# Altium PCB Trinamic Driver PCB.PcbDoc
Units mil, origin at the board's own origin, x right, y up, seen from the top; angles counter-clockwise.
Board outline 920 x 2060 mil, 2 copper layers (Top Layer, Bottom Layer); 21 components, 34 nets, 109 pads, 14 vias.
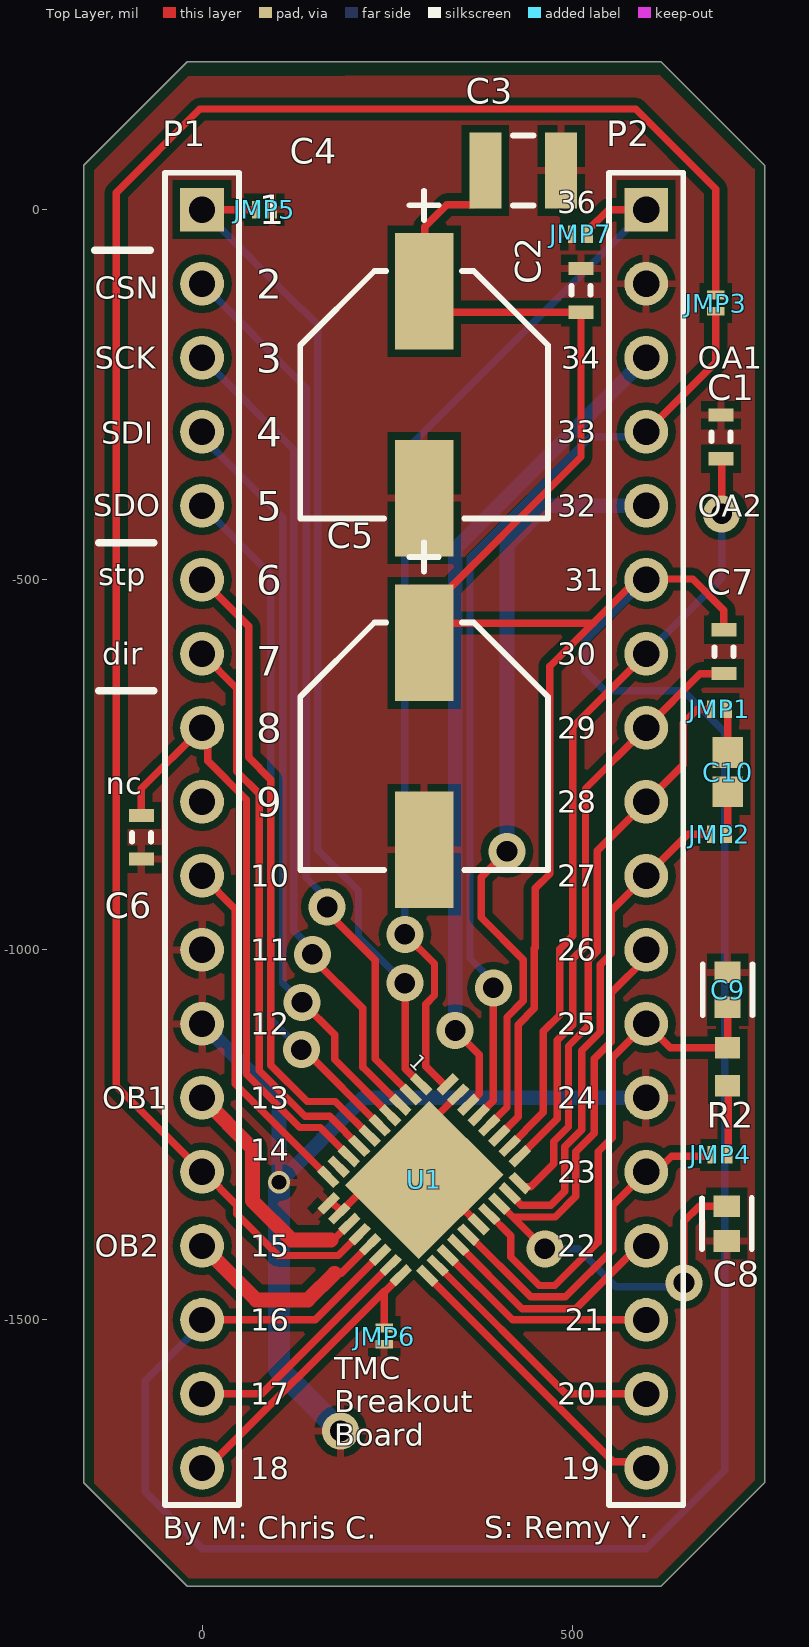
[diagram p0: Top Layer view]
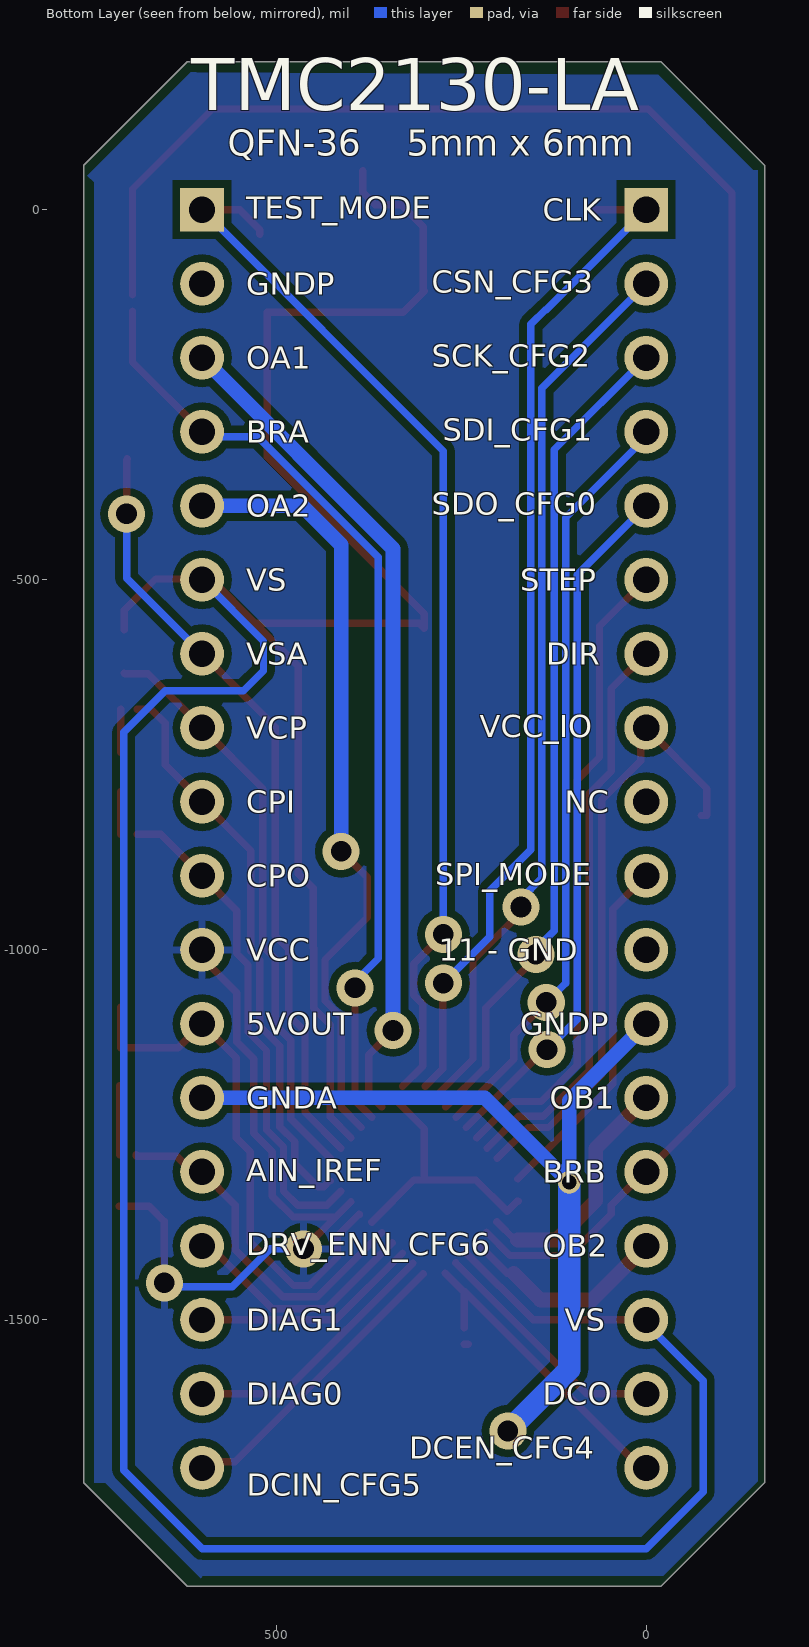
[diagram p1: Bottom Layer view, seen from below]

## Layer stack, top to bottom
Top Solder: solder mask 0.4, Solder Resist, Dk 3.5
Top Layer: signal copper 1.4
Dielectric 1: dielectric 12.6, FR-4, Dk 4.8
Bottom Layer: signal copper 1.4
Bottom Solder: solder mask 0.4, Solder Resist, Dk 3.5

## Board outline
-160,60 -20,200 620,200 760,60 760,-1720 620,-1860 -20,-1860 -160,-1720

## Design rules (kind name [scope] priority, off if disabled: settings)
Clearance [All] p1: gap=10 ignorepadtopadclearanceinfootprint=FALSE except(0: Arc-Hole Track-Hole SMDPad-Hole THPad-Hole Via-Hole Fill-Hole Poly-Hole Region-Hole Text-Hole; 4.9: SMDPad-SMDPad; 5: Arc-Arc Arc-Track Track-Track; 8: Arc-SMDPad Track-SMDPad)
MinimumSolderMaskSliver [All] p1: minsoldermaskwidth=3
PolygonConnect [All] p1: connectstyle=Relief reliefconductorwidth=10 reliefentries=4 polygonreliefangle="90 Angle" airgapwidth=10
RoutingVias [All] p1: holewidth=28 width=50 viastyle="Through Hole" minholewidth=28 minwidth=50 maxholewidth=28 maxwidth=50
SilkToSilkClearance [All] p1: silktosilkclearance=0
SilkToSolderMaskClearance [IsPad] p1: minsilkscreentomaskgap=0 clearancetoexposedcopper=TRUE
SolderMaskExpansion SolderMaskExpansion_1 [IsVia] p1: expansion=4 istentingtop=TRUE
SolderMaskExpansion [All] p2: expansion=4 istentingtop=FALSE
Width [All] p1: maxlimit=30 minlimit=10 preferedwidth=20 minimp=50.000000 maximp=50.000000 favimp=50.000000
27 further rules are at their usual default settings.

## Components (designator, comment, footprint, x,y, rotation, side; value= is the part's Value field where it differs from the comment)
C1 "0.1uF" CAPC1608X90X20LL10 701,-307 r270 top
C2 "0.1uF" CAPC1608X90X20LL10 512,-109 r270 top
C3 "47uF" CAPC3225X270X50LL20T25 434,53 r180 top
C4 "100uF" FP-EEE-FK1H101P-MFG 300,-250 r90 top
C5 "100uF" FP-EEE-FK1H101P-MFG 300,-725 r90 top
C6 "0.1uF" CAPC1608X90X20LL10 -82,-848 r90 top
C7 "0.1uF" CAPC1608X90X20LL10 705,-597 r270 top
C8 "0.47uF" FP-C0603C-CF-MFG 709,-1370 r90 top value="0.47 μF"
C9 "4.7uF" FP-C0603-CG-MFG 710,-1054 r90 top
C10 "22nF" CAPC1608X90X40ML10T20 710,-760 r270 top
JMP1 "Solder Jump" "Solder Jump" 688,-675 r0 top
JMP2 "Solder Jump" "Solder Jump" 688,-844 r0 top
JMP3 "Solder Jump" "Solder Jump" 694,-115.09 r270 top
JMP4 "Solder Jump" "Solder Jump" 689,-1277 r0 top
JMP5 "Solder Jump" "Solder Jump" 95,0 r180 top
JMP6 "Solder Jump" "Solder Jump" 246,-1511 r270 top
JMP7 "Solder Jump" "Solder Jump" 522,-33 r180 top
P1 "Header 18" HDR1X18 0,0 r270 top
P2 "Header 18" HDR1X18 600,0 r270 top
R2 "10K" RESC1609X55X30LL15T15 710,-1158 r90 top
U1 "TMC2130-LA" QFN-36 300,-1311 r315 top

## Footprints (in the part's own frame and the unit in brackets; to place one, negate y for a bottom-side part, rotate by r counter-clockwise, add the part's x,y. Pads: shape width x height; smd on the part's side, far side on the other; paste and mask are expansions set on the pad)
CAPC1608X90X20LL10 [mm] "Chip Capacitor, 2-Leads, Body 1.70x0.90mm, IPC High Density"
  rect 0.45x0.85 smd: 1(-0.75,0) 2(0.75,0)
  silkscreen extent -0.15,-0.33 0.15,0.33, body extent -0.85,-0.45 0.85,0.45, height 0.9
CAPC1608X90X40ML10T20 [mm] "Chip Capacitor, 2-Leads, Body 1.7x0.9mm, IPC Low Density"
  rect 1.05x1.05 smd: 1(-0.675,0) 2(0.675,0)
  body extent -0.85,-0.45 0.85,0.45, height 0.9
CAPC3225X270X50LL20T25 [mm] "Chip Capacitor, 2-Leads, Body 3.20x2.50mm, IPC High Density"
  rect 1.1x2.6 smd: 1(-1.3,0) 2(1.3,0)
  silkscreen extent -0.35,-1.2 0.35,1.2, body extent -1.7,-1.35 1.7,1.35, height 2.7
FP-C0603-CG-MFG [mm]
  rect 0.75x0.9 smd paste+0 mask+0: 1(-0.6,0) 2(0.6,0)
  silkscreen extent -0.87,-0.85 0.87,0.85, body extent -1.2,-0.6 1.2,0.6, height 0.25
FP-C0603C-CF-MFG [mm]
  rect 0.75x0.9 smd paste+0 mask+0: 1(-0.6,0) 2(0.6,0)
  silkscreen extent -0.87,-0.85 0.88,0.85, body extent -1.2,-0.6 1.2,0.6, height 0.25
FP-EEE-FK1H101P-MFG [mm]
  rect 4x2 smd paste+0 mask+0: 1(-3.55,0) 2(3.55,0)
  silkscreen extent -4.25,-4.25 7,4.25, body extent -5.8,-4.5 5.8,4.5, height 0.25
HDR1X18 [mm] "Connector; Header; 18 Position"
  rect 1.5x1.5 hole 0.9: 1(0,0)
  round 1.5 hole 0.9: 2(2.54,0) 3(5.08,0) 4(7.62,0) 5(10.16,0) 6(12.7,0) 7(15.24,0) 8(17.78,0) 9(20.32,0) 10(22.86,0) 11(25.4,0) 12(27.94,0) 13(30.48,0) 14(33.02,0) 15(35.56,0) 16(38.1,0) 17(40.64,0) 18(43.18,0)
  silkscreen extent -1.27,-1.27 44.45,1.27
QFN-36 [mm]
  rect 0.8x0.3 smd mask+0: 1(-2.4,2.25) 2(-2.4,1.75) 3(-2.4,1.25) 4(-2.4,0.75) 5(-2.4,0.25) 6(-2.4,-0.25) 7(-2.4,-0.75) 8(-2.4,-1.25) 9(-2.4,-1.75) 10(-2.4,-2.25) 19(2.4,-2.25) 20(2.4,-1.75) 21(2.4,-1.25) 22(2.4,-0.75) 23(2.4,-0.25) 24(2.4,0.25) 25(2.4,0.75) 26(2.4,1.25) 27(2.4,1.75) 28(2.4,2.25)
  rect 0.3x0.8 smd mask+0: 11(-1.75,-2.875) 12(-1.25,-2.875) 13(-0.75,-2.875) 14(-0.25,-2.875) 15(0.25,-2.875) 16(0.75,-2.875) 17(1.25,-2.875) 18(1.75,-2.875) 29(1.75,2.9) 30(1.25,2.9) 31(0.75,2.9) 32(0.25,2.9) 33(-0.25,2.9) 34(-0.75,2.9) 35(-1.25,2.9) 36(-1.75,2.9)
  rect 3.6x4.1 smd mask+0: -(0,0)
RESC1609X55X30LL15T15 [mm] "Chip Resistor, 2-Leads, Body 1.75x0.95mm, IPC High Density"
  rect 0.75x0.85 smd: 1(-0.65,0) 2(0.65,0)
  body extent -0.87,-0.48 0.87,0.48, height 0.55
"Solder Jump" [mm]
  rect 0.3x0.6 smd mask+0: 1(0,0) 2(0.559,0)

## Part data
C1 C2 C6 C7: library part CMP-2000-07546-1, "Chip Capacitor, 0.1 uF, +/- 10%, 50 V, -55 to 125 degC, 0603 (1608 Metric), RoHS, Tape and Reel", Capacitance=100nF, Case Code (Imperial)=0603, Case Code (Metric)=1608, Dielectric=X7R, Manufacturer=TDK, Max Operating Temperature=125degC, Min Operating Temperature=-55degC, Package Description="2-Pin Surface Mount Device, Body 1.6 x 0.8 mm", Package Quantity=1, Package Reference=603, Tolerance=10%, Voltage=50V, Case/Package=0603, Composition=Ceramic, Datasheet URL=https://product.tdk.com/info/en/catalog/datasheets/mlcc_automotive_general_en.pdf, Datasheet Version=12/2014, Depth=0.8mm, Height=0.8mm, Lead Free=LeadFree, Length=1.6mm, Manufacturer URL=http://www.tdk.com/, Mount=SurfaceMount, Mounting Technology=SurfaceMount, Packaging=TapeandReel, Radiation Hardening=No, REACH SVHC=NoSVHC, RoHSCompliant=True, Termination=SMD/SMT, Thickness=0.035inch, Voltage Rating=50V, Voltage Rating (DC)=50V, Weight=7.1E-05oz, Width=0.8mm
C3: library part CMP-2000-06020-1, "Chip Capacitor, 47 uF, +/- 20%, 16 V, -55 to 85 degC, 1210 (3225 Metric), RoHS, Tape and Reel", Capacitance=47µF, Manufacturer=Kemet, Operating Temperature=-55°C~85°C, Package / Case=1210(3225Metric), Package Description="2-Pin Surface Mount Device, Body 3.2 x 2.5 mm", Package Reference=1210, Ratings=-, Standard Package=1, Temperature Coefficient=X5R, Tolerance=±20%, Voltage - Rated=16V, Applications=GeneralPurpose, Catalog Drawings=ACTU_1210, Category=Capacitors, Datasheet URL=http://www.datasheets360.com/pdf/-8690541728068054270, Datasheet Version=05/2013, Family=CeramicCapacitors, Features=-, Height - Seated (Max)=-, Lead Spacing=-, Lead Style=-, Manufacturer URL=http://www.kemet.com/, Mounting Technology=SurfaceMount, Mounting Type=SurfaceMount,MLCC, Online Catalog=X5RDielectric(CommercialGrade), Other Names=399-5514-6, Packaging=Digi-Reel®, Product Training Modules=CapacitorBasics-TypicalUsesforCapacitors, Series=C, Size / Dimension="0.126\"Lx0.098\"W(3.20mmx2.50mm)", Thickness (Max)="0.110\"(2.80mm)"
C4 C5: library part CMP-05427-000005-1, "CAP ALUM 100UF 20% 50V SMD", Leakage Current=50uA, Manufacturer="Panasonic Electronic Components", Manufacturer Part Number=EEE-FK1H101P, Package=0, Ripple Current=350mA, Temperature="-55°C to +105°C", Temperature Range High=+105°C, Temperature Range Low=-55°C, Tolerance=20%, Voltage Rating=50V, Automotive=Yes, Automotive Grade="Grade 2", Capacitance=100uF, Category=Cap, ComponentLink2Description=Datasheet, ComponentLink2URL=https://industrial.panasonic.com/cdbs/www-data/pdf/RDE0000/ABA0000C1181.pdf, Device Class L1="Passive Components", Device Class L2=Capacitors, Device Class L3="Aluminum Electrolytic Capacitors", Digikey Description="CAP ALUM 100UF 20% 50V SMD", Dissipation Factor=10%, Esr=0.34Ω, Height=10.5mm, Lead Free=Yes, Life=2000Hours, Material=Aluminum, Mouser Description="Cap Aluminum Lytic 100uF 50V 20% (8 X 10.2mm) SMD 350mA 2000h 105C Automotive T/R", Octopart=https://octopart.com/eeefk1h101p-panasonic-4642841, RoHS=TRUE
C8: library part CMP-03020-024061-1, "CAP CER 0.47UF 16V X7R 0603", Capacitance="0.47 μF", Manufacturer=KEMET, Manufacturer Part Number=C0603C474K4RACTU, Package=C0603C-CF, Temperature="-55°C to +125°C", Temperature Characteristic=X7R, Temperature Coefficient=30ppm/°C, Temperature Range High=+125°C, Temperature Range Low=-55°C, Tolerance=0.1, Voltage Rating="16 V", Automotive=Yes, Automotive Grade="Grade 1", Category=Cap, ComponentLink2Description=Datasheet, ComponentLink2URL=https://api.kemet.com/component-edge/download/datasheet/C0603C100J5GACAUTO.pdf, Device Class L1="Passive Components", Device Class L2=Capacitors, Device Class L3="Ceramic Capacitors", Digikey Description="CAP CER 0.47UF 16V X7R 0603", Height=0.87mm, Lead Free=Yes, Material=Ceramic, Mouser Description="0603 C 470nF Ceramic Multilayer Capacitor, 16 V, +125degC, X7R Dielec, +/-10%", Octopart=https://octopart.com/c0603c474k4ractu-kemet-109683, RoHS=TRUE
C9: library part CMP-03020-024641-1, "CAP CER 4.7UF 6.3V X5R 0603", Manufacturer=Kemet, Manufacturer Part Number=C0603C475K9PACTU, Package=C0603-CG, Temperature="-55°C to +85°C", Temperature Characteristic=X5R, Temperature Coefficient=15%, Temperature Range High=+85°C, Temperature Range Low=-55°C, Tolerance=10%, Voltage Rating=6.3V, Automotive=No, Capacitance=4.7uF, Category=Cap, ComponentLink2Description=Datasheet, ComponentLink2URL=https://content.kemet.com/datasheets/KEM_C1006_X5R_SMD.pdf, Device Class L1="Passive Components", Device Class L2=Capacitors, Device Class L3="Ceramic Capacitors", Digikey Description="CAP CER 4.7UF 6.3V X5R 0603", Height=0.9mm, Ipc Land Pattern Name=CAPC16080X80, Lead Free=Yes, Material=Ceramic, Mouser Description="Multilayer Ceramic Capacitors MLCC - SMD/SMT 6.3volts 4.7uF X5R 10%", Octopart=https://octopart.com/c0603c475k9pactu-kemet-104242, RoHS=TRUE
C10: library part CMP-2100-03602-1, "Chip Capacitor, 22 nF, +/- 10%, 50 V, -55 to 125 degC, 0603 (1608 Metric), RoHS, Tape and Reel", Case Code (Imperial)=0603, Case Code (Metric)=1608, Dielectric=X7R, Dielectric Material=Ceramic, Insulation Resistance=100GR, Manufacturer=Yageo, Max Operating Temperature=125degC, Min Operating Temperature=-55degC, Package Description="2-Pin Surface Mount Device, Body 1.6 x 0.8 mm", Package Quantity=1, Tolerance=10%, Voltage Rating=50V, Capacitance=22nF, Case/Package=0603, Composition=Ceramic, Datasheet URL=http://www.yageo.com/documents/recent/UPY-GPHC_X7R_6.3V-to-50V_15.pdf, Datasheet Version="Rev. 15, 10/2016", Depth=0.8mm, Height=0.8mm, Lead Free=LeadFree, Length=1.6mm, Manufacturer URL=http://www.yageo.com/, Mount=SurfaceMount, Number of Pins=2, Package Reference=0603, Packaging=TapeandReel, Radiation Hardening=No, REACH SVHC=NoSVHC, RoHSCompliant=True, Termination=SMD/SMT, Thickness=0.035inch, Voltage Rating (DC)=50V, Width=0.031inch
P1 P2: "Header, 18-Pin", LatestRevisionDate=17-Jul-2002, LatestRevisionNote="Re-released for DXP Platform.", Publisher="Altium Limited"
R2: library part CMP-2000-07452-1, "Chip Resistor, 10 KOhm, +/- 1%, 0.1 W, -55 to 155 degC, 0603 (1608 Metric), RoHS, Tape and Reel", Case Code (Imperial)=0603, Case Code (Metric)=1608, Manufacturer=Panasonic, Max Operating Temperature=155degC, Max Power Dissipation=100mW, Min Operating Temperature=-55degC, Package Description="2-Pin Surface Mount Device, Body 1.6 x 0.85 mm", Package Quantity=1, Package Reference=603, Resistance=10KOhm, Temperature Coefficient=100ppm\/degreesC, Tolerance=1%, Voltage Rating=75V, Case\/Package=0603, Composition=ThickFilm, Contact Plating=Tin, Datasheet URL=https://industrial.panasonic.com/cdbs/www-data/pdf/RDA0000/AOA0000C304.pdf, Datasheet Version=02/2017, Depth=0.8mm, Height=0.45mm, Lead Free=LeadFree, Length=1.6mm, Manufacturer URL=http://www.panasonic.com/, Military Standard=Not, Mount=SurfaceMount, Mounting Technology=SurfaceMount, Number of Pins=2, Number of Terminations=2, Packaging=TapeandReel, Power Rating=100mW, Radiation Hardening=No, REACH SVHC=NoSVHC, RoHSCompliant=true, Termination=SMD/SMT, Voltage Rating (DC)=75V, Width=0.031inch
U1: "TMC2130-LA Trinamic Driver QFN-36"

## Via types
v1: diameter 50, hole 28, Top Layer to Bottom Layer, tented both sides, 13 vias
v2: diameter 30, hole 20, Top Layer to Bottom Layer, tented both sides, 1 vias

## Nets (pads, with @x,y where several pads share a name; then routed paths per layer and width w, separated by ;. In a path a pad name is that pad's centre, name@x,y a point inside that pad or via, vN(x,y) a via of type N, cw(c..) or ccw(c..) an arc to the next point about the centre after c; other vN are vias at no path point)
5VOUT: C9.1 P2.12 R2.2 U1.25 | length 741.3
  Top Layer w10: U1.25@387.69,-1357.69 U1.25 417,-1386.24 417,-1415 455.48,-1453.48 476.52,-1453.48 535,-1395 535,-1273 554,-1254 554,-1146 P2.12 ; P2.12@600,-1088 P2.12 ; C9.1 R2.2 632.41,-1132.41 P2.12
AIN_IREF: JMP4.1 P2.14 U1.23 | length 483.3
  Top Layer w10: U1.23@357.07,-1381.99 444.08,-1469 491,-1469 555,-1405 555,-1345 P2.14 613.27,-1300 634.27,-1279 688.09,-1279 689,-1278.09 JMP4.1
BRA: JMP3.2 P2.4 U1.33 | length 1288.8
  Top Layer w10: U1.33@370.99,-1226.09 393.4,-1203.68 v1(393.4,-1051.4) ; P2.4 694,-206 JMP3.2
  Bottom Layer w10: v1(393.4,-1051.4) 393.4,-1043.11 362,-1011.71 362,-469.68 524.68,-307 P2.4@593,-307
  Bottom Layer w15: P2.4@593,-307 P2.4
BRB: JMP3.1 P1.14 U1.14 | length 2698.4
  Top Layer w10: U1.14@215.79,-1381.29 184.08,-1413 103,-1413 47,-1357 47,-1345 2,-1300 P1.14 -116,-1184 -116,23 -3,136 586,136 694,28 JMP3.1
CLK: JMP5.2 P1.1 U1.1 | length 1381.6
  Top Layer w10: P1.1 JMP5.2 ; v1(274,-1045) 274.73,-1045.73 274.73,-1160.46 U1.1@298.61,-1184.33
  Bottom Layer w10: P1.1 135,-135 136,-135 156,-155 156,-865 211.32,-920.32 211.32,-982.32 v1(274,-1045)
CPI: JMP1.1 P2.9 U1.28 | length 777.7
  Top Layer w10: U1.28@426.67,-1312.39 427.95,-1312.39 435.64,-1320.08 443.92,-1320.08 475,-1289 475,-1259 495,-1239 495,-1130 522,-1103 522,-1014 534,-1002 534,-866 P2.9 650,-750 650,-694 669,-675 JMP1.1
CPO: JMP2.1 P2.10 U1.27 | length 675.6
  Top Layer w10: U1.27@412.75,-1326.31 431.44,-1345 471,-1345 490,-1326 490,-1266 513,-1243 513,-1136 538,-1111 538,-1020 553,-1005 553,-947 P2.10 656,-844 JMP2.1
CSN_CFG3: P1.2 U1.2 | length 1216.2
  Top Layer w10: v1(169,-942) 169,-949 234,-1014 234,-1147.56 U1.2@284.69,-1198.25
  Bottom Layer w10: P1.2 141,-241 141,-903 169,-931 v1(169,-942)
DCEN_CFG4: JMP6.1 P1.18 U1.18 | length 430.8
  Top Layer w10: P1.18 7.16,-1700 246,-1461.16 JMP6.1 ; 246,-1462.44 U1.18@271.47,-1436.97
DCIN_CFG5: P2.18 U1.19 | length 407.3
  Top Layer w10: U1.19@301.39,-1437.67 555.47,-1691.75 591.75,-1691.75 P2.18
DCO: P1.17 U1.17 | length 330.8
  Top Layer w10: P1.17 80.6,-1600 U1.17@257.55,-1423.05
DIAG0: P2.17 U1.20 | length 357.7
  Top Layer w10: U1.20@315.31,-1423.75 491.56,-1600 P2.17
DIAG1: P2.16 U1.21 | length 308.1
  Top Layer w10: U1.21@329.23,-1409.83 419.4,-1500 P2.16
DIR: P1.7 U1.7 | length 776.4
  Top Layer w10: P1.7 47,-647 47,-759 77,-789 77,-1163 139,-1225 172.24,-1225 U1.7@215.09,-1267.85
DRV_ENN_CFG6: P2.15 U1.22 | length 329
  Top Layer w10: U1.22@343.15,-1395.91 432.24,-1485 505,-1485 590,-1400 P2.15
GND: C1.1 C2.1 C3.1 C4.1 C5.1 C6.1 C8.1 C9.2 JMP5.1 JMP6.2 JMP7.2 P1.11 P1.12 P2.2 P2.13 U1.11 U1.12 U1.24 U1.35 U1.- | length 1564.5
  Top Layer w10: U1.11@172.75,-1339.53 174.03,-1339.53 187.95,-1353.45 230.4,-1311 U1.- ; JMP6.2@240.09,-1533 JMP6.2 ; U1.35@343.15,-1198.25 300,-1241.4 U1.- ; U1.24@370.99,-1368.07 313.92,-1311 U1.- ; P2.13@591.47,-1208.53 P2.13
  Bottom Layer w20: P1.12 104,-1204 v2(104,-1314) 218,-1200 P2.13
  Bottom Layer w30: v2(104,-1314) 104,-1567 v1(187,-1650)
MISO_CFG0: P1.5 U1.5 | length 948.9
  Top Layer w10: P1.5 P1.5@6,-400 ; v1(134,-1135) 137.92,-1135 U1.5@242.93,-1240.01
  Bottom Layer w10: P1.5 93,-493 93,-1094 v1(134,-1135)
MOSI_CFG1: P1.4 U1.4 | length 1031
  Top Layer w10: P1.4@0,-302 P1.4 ; v1(135,-1071) 179,-1115 179,-1148.24 U1.4@256.85,-1226.09
  Bottom Layer w10: P1.4@-2.5,-304.5 108.9,-415.9 108.9,-1044.9 v1(135,-1071)
NetC10_1: C10.1 JMP1.2 | length 58.4
  Top Layer w10: C10.1 JMP1.2
NetC10_2: C10.2 JMP2.2 | length 57.4
  Top Layer w10: JMP2.2 C10.2
NetJMP4_2: JMP4.2 R2.1 | length 93.4
  Top Layer w10: JMP4.2 R2.1@711,-1183.59
OA1: P2.3 U1.34 | length 1145.5
  Top Layer w10: v1(342,-1109) 374.6,-1141.6 374.6,-1194.64 U1.34@357.07,-1212.17
  Top Layer w20: v1(342,-1109) v1@346,-1113
  Bottom Layer w20: v1(342,-1109) 342,-458 P2.3
OA2: P2.5 U1.32 | length 1055.4
  Top Layer w10: U1.32@384.91,-1240.01 412,-1212.92 412,-1091 434,-1069 434,-1013.28 377,-956.28 377,-902 v1(412,-867)
  Bottom Layer w20: v1(412,-867) 412,-453 465,-400 P2.5
OB1: P1.13 U1.13 | length 333.2
  Top Layer w10: 174,-1392 177.24,-1392 U1.13@201.87,-1367.37
  Top Layer w20: P1.13 68,-1268 68,-1339 121,-1392 174,-1392
OB2: P1.15 U1.15 | length 292.2
  Top Layer w10: 179,-1437 187.92,-1437 U1.15@229.71,-1395.21
  Top Layer w20: P1.15 73,-1473 143,-1473 179,-1437
SCK_CFG2: P1.3 U1.3 | length 1133.3
  Top Layer w10: P1.3@0,-209 P1.3 ; v1(149,-1006) 149,-1011 217,-1079 217,-1158.4 U1.3@270.77,-1212.17
  Bottom Layer w10: P1.3 124,-324 124,-974.43 149,-999.43 v1(149,-1006)
SPI_MODE: P1.10 U1.10 | length 481.4
  Top Layer w10: P1.10 45,-945 45,-1181.27 U1.10@173.33,-1309.61
STEP: P1.6 U1.6 | length 871.1
  Top Layer w10: P1.6 63,-563 63,-740 93,-770 93,-1156 142,-1205 180.08,-1205 U1.6@229.01,-1253.93
TST_MODE: JMP7.1 P2.1 U1.36 | length 1447.3
  Top Layer w10: v1(274,-979) 314,-1019 314,-1061.57 302,-1073.57 302,-1157.1 U1.36@329.23,-1184.33 ; JMP7.1 522,-27.09 549.09,0 P2.1
  Bottom Layer w10: v1(274,-979) 274,-326 P2.1
VCC: C8.2 P2.11 U1.26 | length 922.1
  Top Layer w10: U1.26@398.83,-1340.23 419.6,-1361 ; v1(463,-1404) 462.6,-1404 419.6,-1361 ; P2.11@600,-1011 553,-1058 553,-1124 530,-1147 530,-1248 505,-1273 505,-1333 477,-1361 419.6,-1361 ; P2.11 P2.11@609.47,-1000 ; v1(651,-1450) 651,-1367 671.62,-1346.38 C8.2 C8.2@711.95,-1346.38
  Bottom Layer w10: v1(463,-1404) 508,-1404 559,-1455 646,-1455 v1(651,-1450)
VCC_IO: C6.2 P1.8 U1.8 | length 841.5
  Top Layer w10: C6.2@-74.13,-818.47 C6.2 -82,-782 P1.8 7.53,-707.53 7.53,-744.53 60,-797 60,-1168 132,-1240 159.4,-1240 U1.8@201.17,-1281.77
VCP: C7.2 P2.8 U1.29 | length 789
  Top Layer w10: U1.29@426.67,-1281.77 480,-1228.44 480,-1122 501,-1101 501,-1012 518,-995 518,-782 P2.8 673.27,-626.73 704.8,-626.73 C7.2
VS: C2.2 C3.2 C4.2 C5.2 C7.1 P1.16 P2.6 U1.16 U1.31 | length 4964.1
  Top Layer w10: P1.16 152.76,-1500 U1.16@243.63,-1409.13 ; C3.2 382.82,23.47 366.17,6.82 330.82,6.82 301,-23 301,-109.24 C4.2 328.29,-138.53 C2.2 512,-333.87 300,-545.87 300,-565.55 307.05,-558.5 528.5,-558.5 ; U1.31@398.83,-1253.93 427,-1225.76 427,-1101 449,-1079 449,-998 450,-997 450,-917 470,-897 470,-617 528.5,-558.5 ; C7.1 705,-541 663,-499 601,-499 P2.6 587,-500 528.5,-558.5
  Bottom Layer w10: P1.16 0,-1505 -77,-1582 -77,-1732 0,-1809 600,-1809 706,-1703 706,-706 650,-650 544,-650 517,-623 517,-583 P2.6
VSA: C1.2 P2.7 U1.30 | length 1051.5
  Top Layer w10: U1.30@412.75,-1267.85 461,-1219.6 461,-1110 483,-1088 483,-999 501,-981 501,-699 P2.7 ; C1.2 702,-337.53 v1(702,-411)
  Bottom Layer w10: P2.7 702,-498 v1(702,-411)
pads on no net: P1.9 U1.9

## Polygon pours and split planes (outlines as drawn)
VCC on Bottom Layer "VCC_L02_P001" (solid, remove dead copper, pour order 1): -16,182 -145,53 -151,53 -151,-1718 -23,-1846 599,-1846 602,-1849 731,-1720 746,-1720 746,37 755,46 615,186 608,186
GND on Top Layer "GND_L01_P000" (solid, remove dead copper, pour order 0): -19,180 -146,53 -146,-1721 -18,-1849 615,-1849 747,-1717 747,55 745,55 618,182

## Silkscreen, mask and mechanical layers (free items; w line width, h text height)
Top Overlay:
  lines w10: -145,-55 -70,-55 ; -140,-650 -65,-650 ; -140,-450 -65,-450
  text "36" at 480.02,-5 h30
  text "1" at 76.67,-19.99 h40
  text "CSN" at -144.97,-120 h30
  text "2" at 73.34,-119.99 h40
  text "SCK" at -144.97,-215 h30
  text "34" at 485.02,-215 h30
  text "OA1" at 670.02,-215 h30
  text "3" at 73.34,-219.99 h40
  text "33" at 480.02,-315 h30
  text "SDI" at -135.98,-316 h30
  text "4" at 73.34,-319.99 h40
  text "SDO" at -146.97,-414 h30
  text "32" at 480.02,-415 h30
  text "OA2" at 670.03,-415 h30
  text "5" at 73.34,-419.99 h40
  text "stp" at -139.98,-507.5 h30
  text "31" at 490.01,-515 h30
  text "6" at 73.34,-519.99 h40
  text "dir" at -134.98,-615 h30
  text "30" at 480.02,-615 h30
  text "7" at 73.34,-629.99 h40
  text "29" at 480.02,-715 h30
  text "8" at 73.34,-719.99 h40
  text "nc" at -129.98,-790 h30
  text "28" at 480.02,-815 h30
  text "9" at 73.34,-819.99 h40
  text "10" at 65.01,-915 h30
  text "27" at 480.02,-915 h30
  text "11" at 65.01,-1015 h30
  text "26" at 480.02,-1015 h30
  text "12" at 65.01,-1115 h30
  text "25" at 480.02,-1115 h30
  text "OB1" at -134.98,-1215 h30
  text "13" at 65.01,-1215 h30
  text "24" at 480.02,-1215 h30
  text "14" at 65.01,-1285 h30
  text "23" at 480.02,-1315 h30
  text "OB2" at -144.97,-1415 h30
  text "15" at 65.01,-1415 h30
  text "22" at 480.02,-1415 h30
  text "16" at 65.01,-1515 h30
  text "21" at 490.01,-1515 h30
  text "17" at 65.01,-1615 h30
  text "20" at 480.02,-1615 h30
  text "TMC / Breakout / Board" at 178.5,-1670 h30
  text "18" at 65.01,-1715 h30
  text "19" at 485.01,-1715 h30
  text "S: Remy Y." at 381,-1795 h30
  text "By M: Chris C." at -53,-1796 h30
Bottom Overlay:
  text "TMC2130-LA" at 614.68,111.47 h120
  text "QFN-36    5mm x 6mm" at 565.58,61.46 h60
  text "TEST_MODE" at 540,-12.5 h30
  text "CLK" at 139.97,-15 h30
  text "CSN_CFG3" at 289.93,-112.5 h30
  text "GNDP" at 540,-115 h30
  text "SCK_CFG2" at 289.93,-212.5 h30
  text "OA1" at 540,-215 h30
  text "SDI_CFG1" at 274.93,-312.5 h30
  text "BRA" at 540,-315 h30
  text "SDO_CFG0" at 289.93,-412.5 h30
  text "OA2" at 540,-415 h30
  text "STEP" at 169.96,-515 h30
  text "VS" at 540,-515 h30
  text "DIR" at 134.98,-615 h30
  text "VSA" at 540,-615 h30
  text "VCC_IO" at 224.95,-712.5 h30
  text "VCP" at 540,-715 h30
  text "NC" at 109.98,-815 h30
  text "CPI" at 540,-815 h30
  text "SPI_MODE" at 284.93,-912.5 h30
  text "CPO" at 540,-915 h30
  text "11 - GND" at 279.93,-1015 h30
  text "VCC" at 540,-1015 h30
  text "GNDP" at 169.96,-1115 h30
  text "5VOUT" at 540,-1115 h30
  text "OB1" at 129.98,-1215 h30
  text "GNDA" at 540,-1215 h30
  text "AIN_IREF" at 540,-1312.5 h30
  text "BRB" at 139.97,-1315 h30
  text "DRV_ENN_CFG6" at 540,-1412.5 h30
  text "OB2" at 139.97,-1415 h30
  text "VS" at 109.98,-1515 h30
  text "DIAG1" at 540,-1515 h30
  text "DCO" at 139.97,-1615 h30
  text "DIAG0" at 540,-1615 h30
  text "DCEN_CFG4" at 319.92,-1687.5 h30
  text "DCIN_CFG5" at 539.92,-1737.5 h30
Mechanical 1:
  the board outline again, w10

## Text inside footprints (layer, text, board x,y; h text height)
U1: Top Overlay "1" at 278.41,-1153.22 h20 r315